# Altium PCB MCU.PcbDoc
Units mil, origin at the board's own origin, x right, y up, seen from the top; angles counter-clockwise.
Board outline 2559.06 x 2559.06 mil, 2 copper layers (Top Layer, Bottom Layer); 48 components, 36 nets, 232 pads, 20 vias.
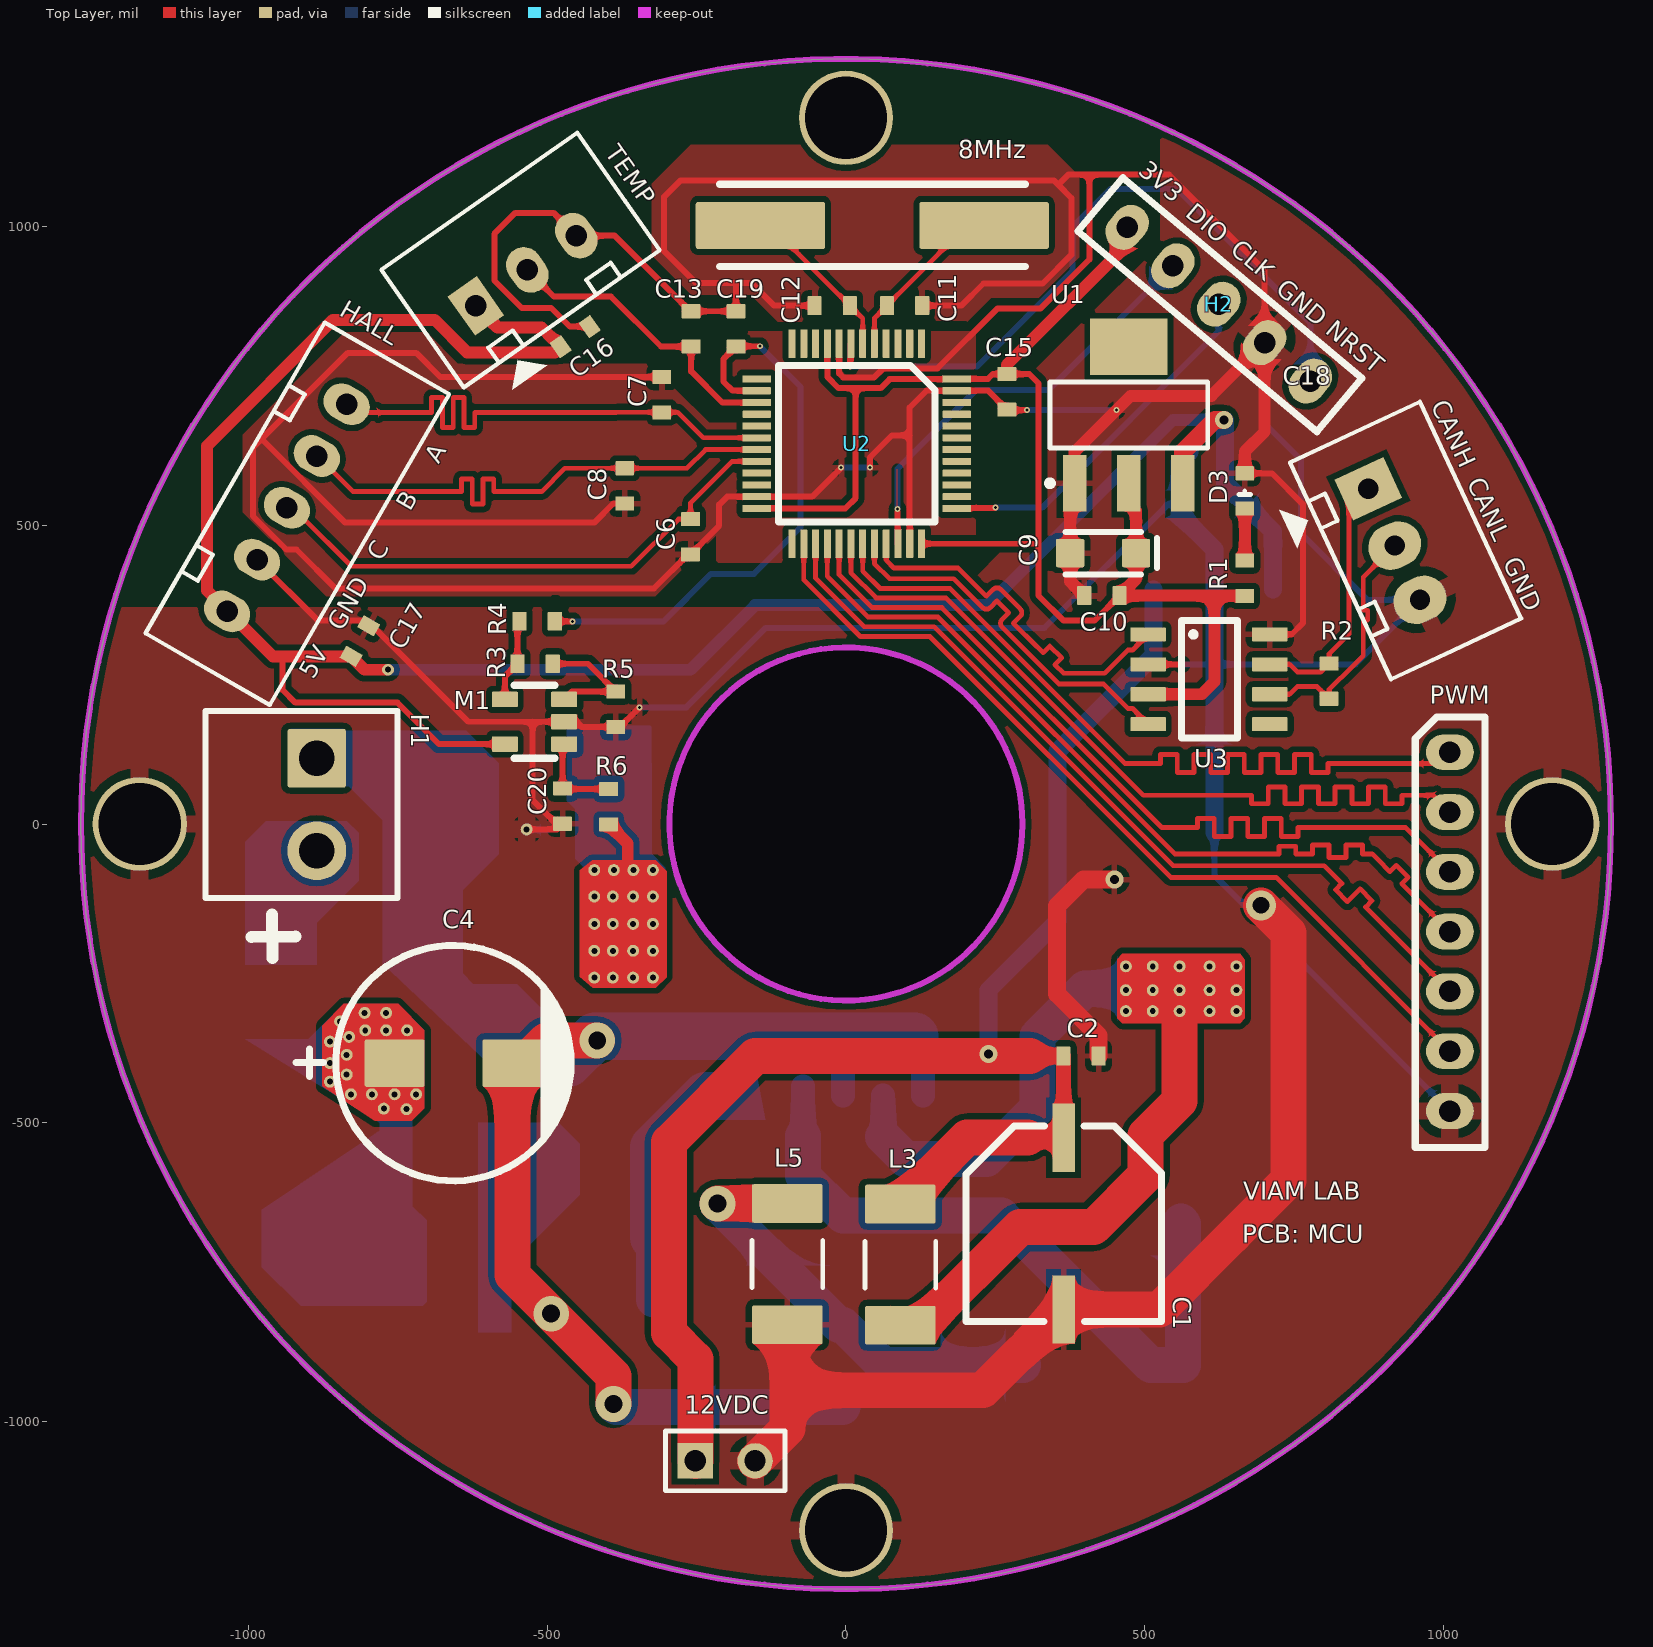
[diagram p0: Top Layer view]
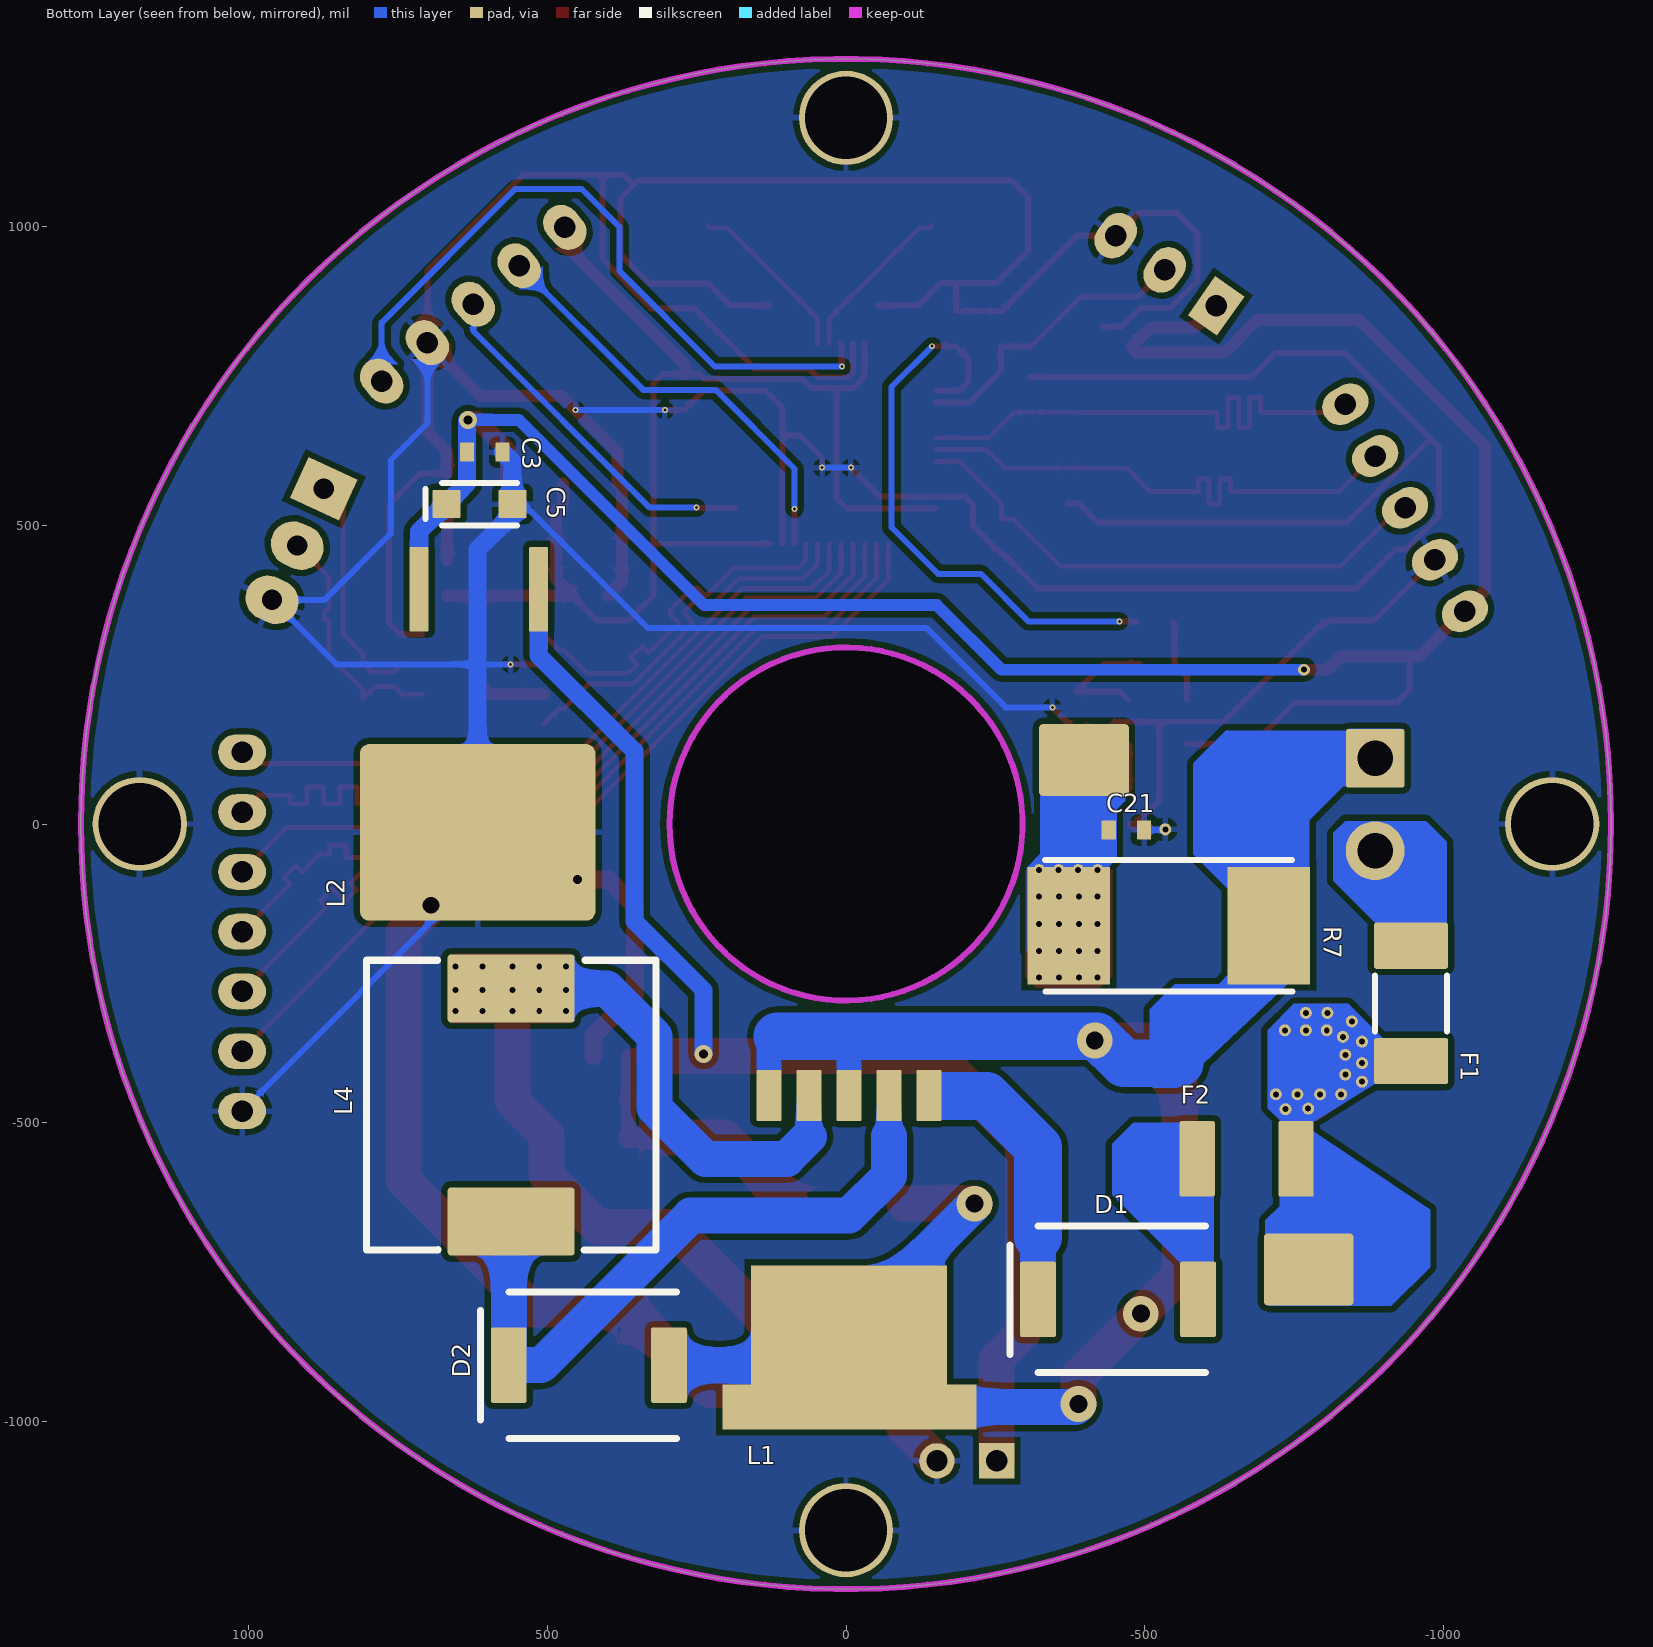
[diagram p1: Bottom Layer view, seen from below]
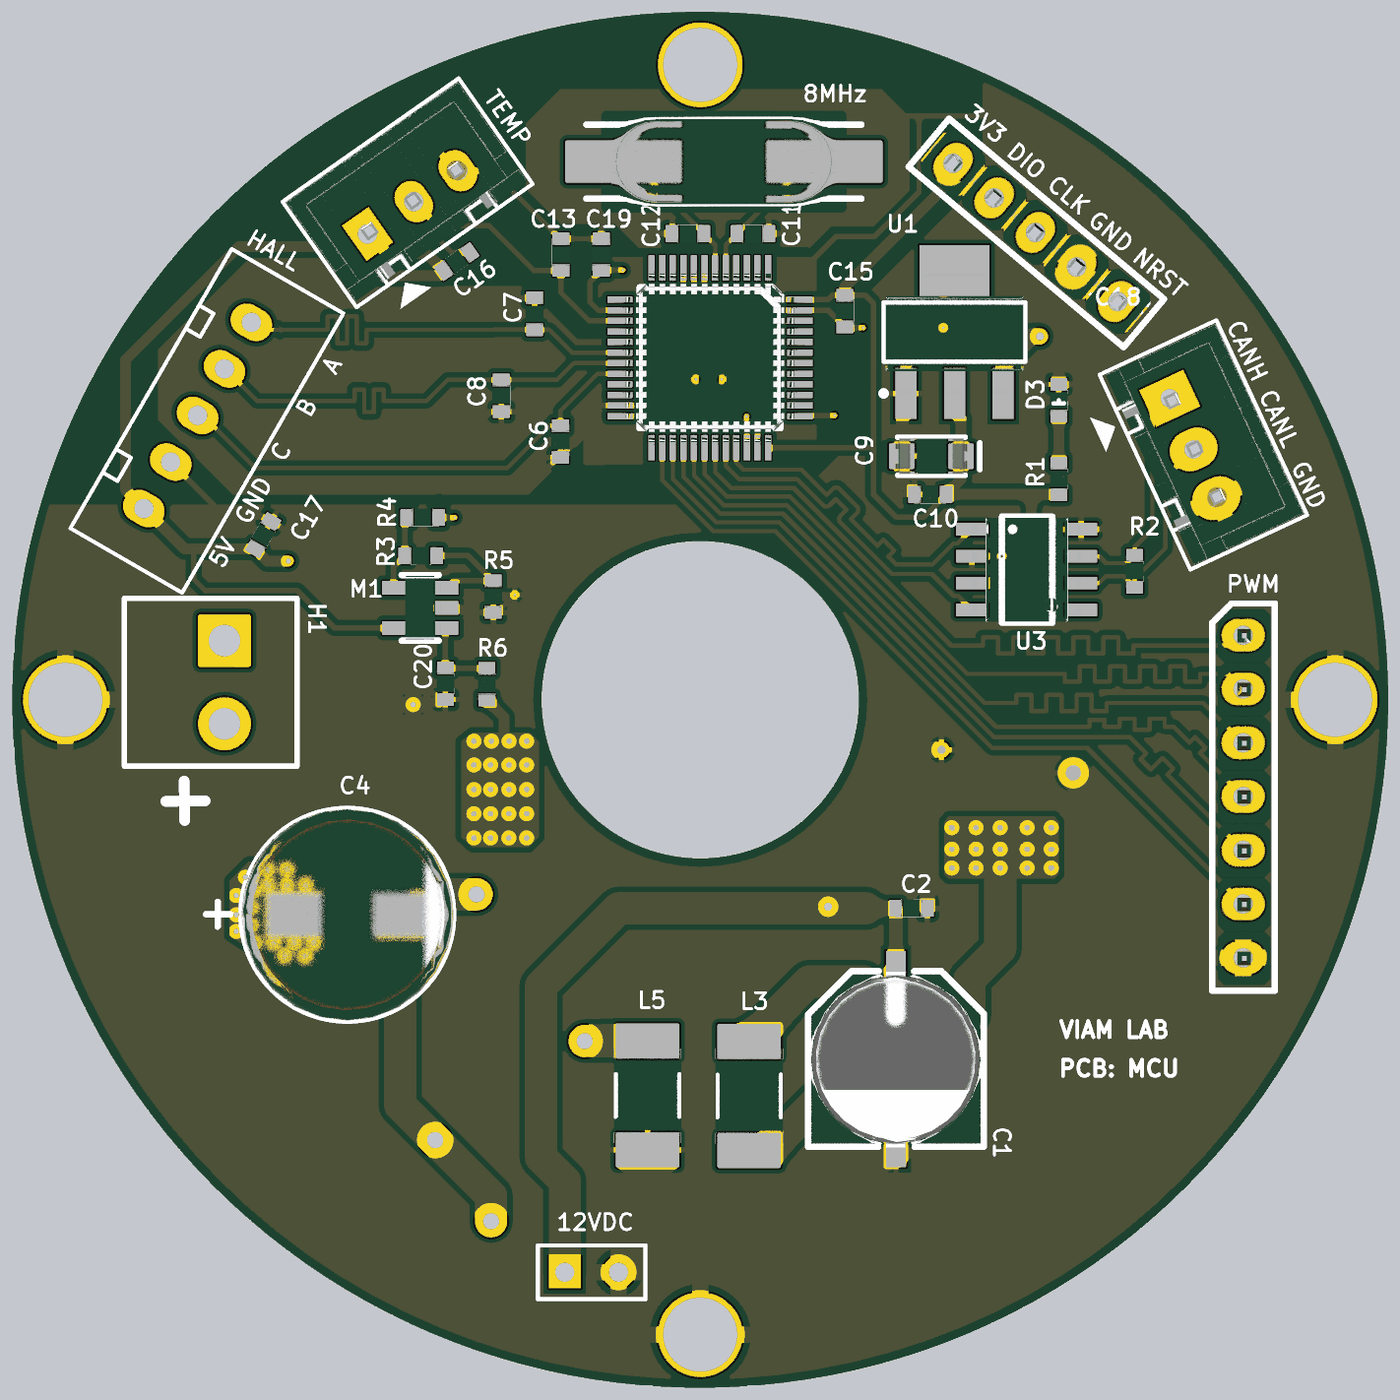
[diagram p2: 3D render of the assembled board from above, using the file's embedded part models]
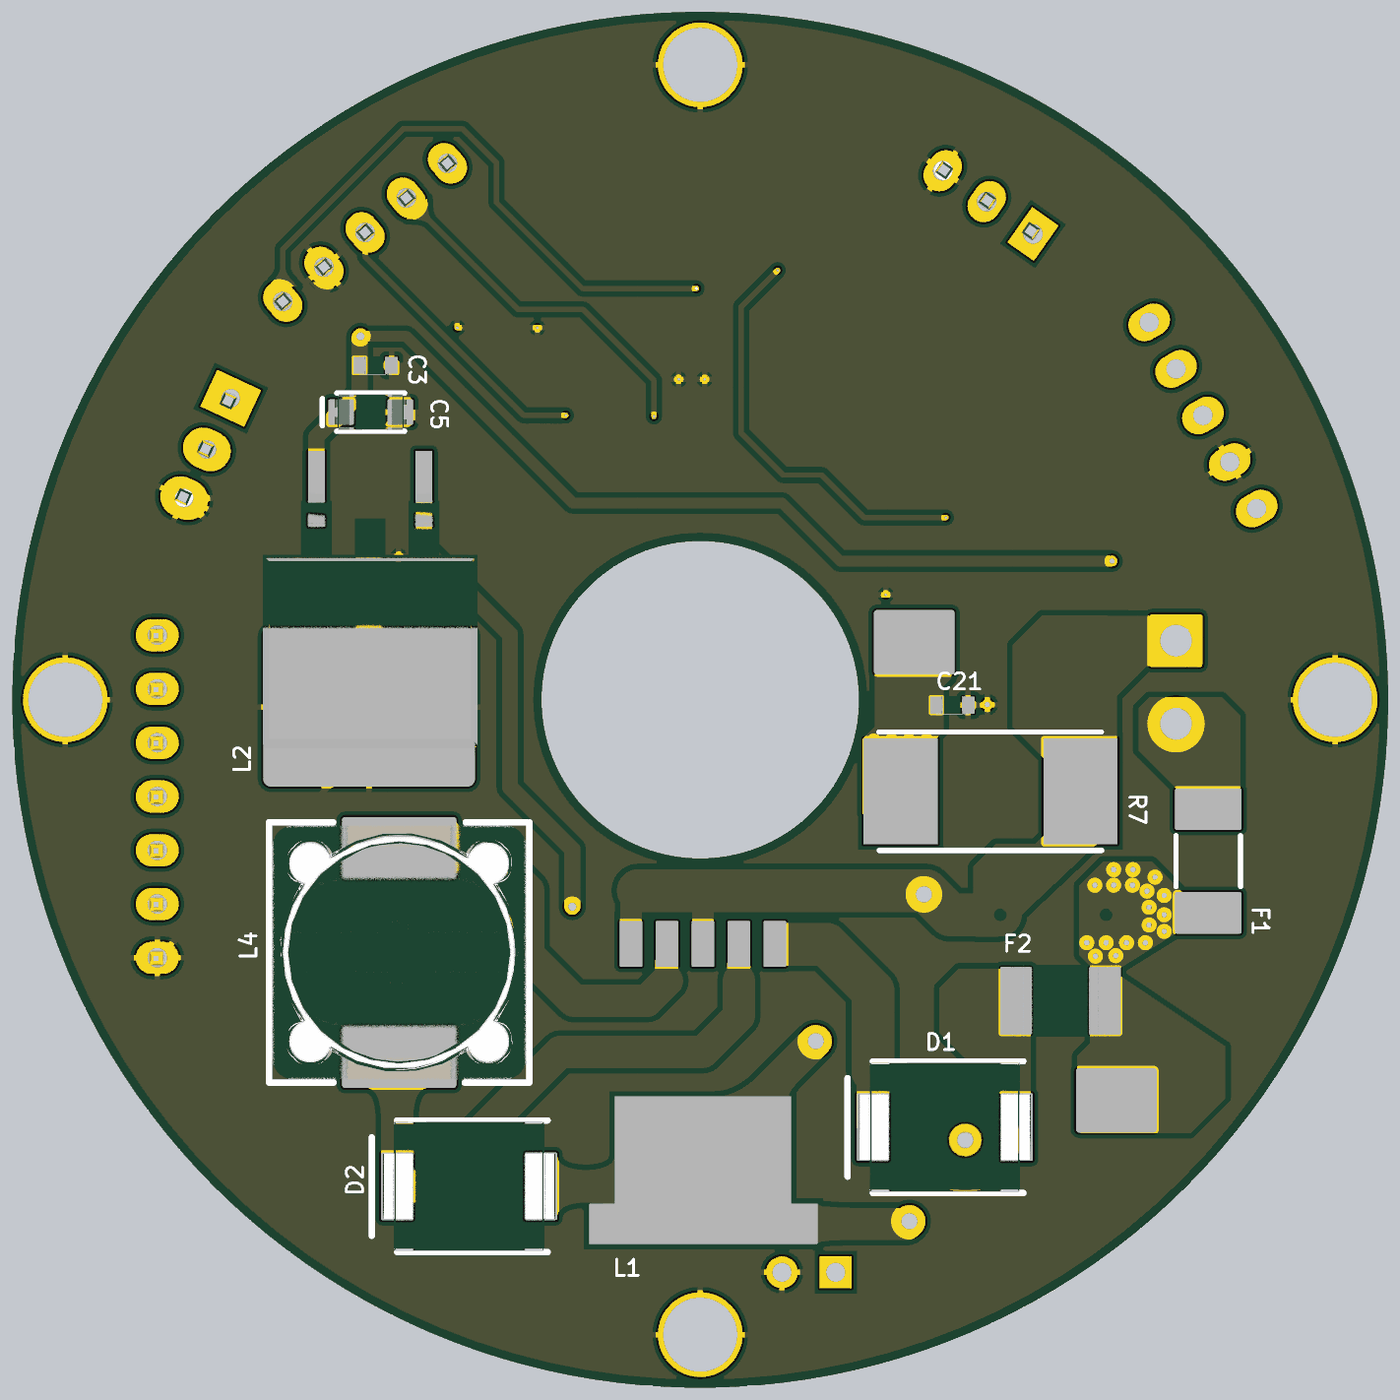
[diagram p3: 3D render of the assembled board from below, using the file's embedded part models]

## Layer stack, top to bottom
Top Solder: solder mask 0.4, Solder Resist, Dk 3.5
Top Layer: signal copper 1.4
Dielectric 1: dielectric 12.6, FR-4, Dk 4.8
Bottom Layer: signal copper 1.4
Bottom Solder: solder mask 0.4, Solder Resist, Dk 3.5

## Board outline
-1279.53,0 ccw(c0,0) 0,-1279.53 ccw(c0,0) 1279.53,0 ccw(c0,0) 0,1279.53 ccw(c0,0)
cut-out: -295.28,0 ccw(c0,0) 0,-295.28 ccw(c0,0) 295.28,0 ccw(c0,0) 0,295.28 ccw(c0,0)

## Design rules (kind name [scope] priority, off if disabled: settings)
Clearance [All] p1: gap=10 ignorepadtopadclearanceinfootprint=FALSE
DiffPairsRouting DiffPair_XTALDiffPairsRouting [InDifferentialPair ('DIFFXTAL')] p1: maxlimit=16 minlimit=16 mostfreqgap=16 toplayer_minwidth=8 toplayer_maxwidth=8 toplayer_prefwidth=8 bottomlayer_minwidth=8 bottomlayer_maxwidth=8 bottomlayer_prefwidth=8 maxuncoupledlength=500
DiffPairsRouting DiffPair_U2CANDiffPairsRouting [InDifferentialPair ('DIFFU_CAN')] p2: maxlimit=10 minlimit=10 mostfreqgap=10 toplayer_minwidth=8 toplayer_maxwidth=8 toplayer_prefwidth=8 bottomlayer_minwidth=8 bottomlayer_maxwidth=8 bottomlayer_prefwidth=8 maxuncoupledlength=500
DiffPairsRouting DiffPair_CANDiffPairsRouting [InDifferentialPair ('DIFFCAN')] p3: maxlimit=16 minlimit=16 mostfreqgap=16 toplayer_minwidth=8 toplayer_maxwidth=8 toplayer_prefwidth=8 bottomlayer_minwidth=8 bottomlayer_maxwidth=8 bottomlayer_prefwidth=8 maxuncoupledlength=500
DiffPairsRouting [InDifferentialPairClass('CANClass')] p4: maxlimit=16 minlimit=16 mostfreqgap=16 toplayer_minwidth=8 toplayer_maxwidth=8 toplayer_prefwidth=8 bottomlayer_minwidth=8 bottomlayer_maxwidth=8 bottomlayer_prefwidth=8 maxuncoupledlength=500
MatchedLengths HALLSensor [InNetClass('HALLSensor')] p1: tolerance=10 checknetsindiffpair=FALSE checkdiffpairvsdiffpair=TRUE checkxsignals=TRUE checkothers=TRUE
MatchedLengths DiffPair_XTALMatchedLengths [InDifferentialPair ('DIFFXTAL')] p2: tolerance=10 checknetsindiffpair=TRUE checkdiffpairvsdiffpair=FALSE checkxsignals=FALSE checkothers=FALSE
MatchedLengths DiffPair_U2CANMatchedLengths [InDifferentialPair ('DIFFU_CAN')] p3: tolerance=10 checknetsindiffpair=TRUE checkdiffpairvsdiffpair=FALSE checkxsignals=FALSE checkothers=FALSE
MatchedLengths DiffPair_CANMatchedLengths [InDifferentialPair ('DIFFCAN')] p4: tolerance=10 checknetsindiffpair=TRUE checkdiffpairvsdiffpair=FALSE checkxsignals=FALSE checkothers=FALSE
MatchedLengths PWM [InNetClass('PWM')] p5: tolerance=10 checknetsindiffpair=FALSE checkdiffpairvsdiffpair=TRUE checkxsignals=TRUE checkothers=TRUE
PlaneConnect [InPadClass('All Pads')] p1: planeconnectstyle=Relief reliefexpansion=30 reliefentries=4 reliefconductorwidth=30 reliefairgap=10
PolygonConnect PolygonConnect_3 [All vs IsNamedPolygon('Top Layer-GND')] p1: thpad.connectstyle=Relief thpad.reliefconductorwidth=30 thpad.reliefentries=4 thpad.polygonreliefangle="90 Angle" thpad.airgapwidth=15 smdpad.connectstyle=Relief smdpad.reliefconductorwidth=10 smdpad.reliefentries=4 smdpad.polygonreliefangle="90 Angle" smdpad.airgapwidth=10 via.connectstyle=Relief via.reliefconductorwidth=10 via.reliefentries=4 via.polygonreliefangle="90 Angle" via.airgapwidth=10
PolygonConnect PolygonConnect_2 [All vs IsNamedPolygon('Top Layer-GND 3') Or  IsNamedPolygon('Top Layer-GND 2')] p2: thpad.connectstyle=Relief thpad.reliefconductorwidth=30 thpad.reliefentries=4 thpad.polygonreliefangle="90 Angle" thpad.airgapwidth=10 smdpad.connectstyle=Relief smdpad.reliefconductorwidth=10 smdpad.reliefentries=4 smdpad.polygonreliefangle="90 Angle" smdpad.airgapwidth=10 via.connectstyle=Relief via.reliefconductorwidth=10 via.reliefentries=4 via.polygonreliefangle="90 Angle" via.airgapwidth=10
PolygonConnect PolygonConnect_1 [All vs IsNamedPolygon('Top Layer-GND') Or  IsNamedPolygon('Top Layer-GND 2')] p3: thpad.connectstyle=Direct thpad.reliefconductorwidth=10 thpad.reliefentries=4 thpad.polygonreliefangle="90 Angle" thpad.airgapwidth=10 smdpad.connectstyle=Relief smdpad.reliefconductorwidth=10 smdpad.reliefentries=4 smdpad.polygonreliefangle="90 Angle" smdpad.airgapwidth=10 via.connectstyle=Relief via.reliefconductorwidth=10 via.reliefentries=4 via.polygonreliefangle="90 Angle" via.airgapwidth=10
PolygonConnect [All] p4: connectstyle=Relief reliefconductorwidth=10 reliefentries=4 polygonreliefangle="90 Angle" airgapwidth=10
RoutingVias [All] p1: holewidth=28 width=50 viastyle="Through Hole" minholewidth=28 minwidth=50 maxholewidth=28 maxwidth=50
SolderMaskExpansion [All] p1: expansion=4
Width [All] p1: maxlimit=100 minlimit=8 preferedwidth=8
28 further rules are at their usual default settings.

## Classes and differential pairs
differential pair class DIFFXTAL: DIFFXTAL
differential pair class CANClass: DIFFCAN DIFFU_CAN
differential pair DIFFXTAL: +DIFFXTAL_P -DIFFXTAL_N
differential pair DIFFCAN: +DIFFCAN_P -DIFFCAN_N

## Components (designator, comment, footprint, x,y, rotation, side; value= is the part's Value field where it differs from the comment)
8MHz "8MHz" Crystal 43.99,1001 r180 top (schematic designator X1)
12VDC "12V" HDR1X2 -252,-1065 r0 top (schematic designator P1)
C1 "330uF/16V" 330uF/16V 364,-524.6 r270 top
C2 "104" "Non-Capacitor 104 SMD" 393,-388 r180 top
C3 "104" "Non-Capacitor 104 SMD" 604,622 r0 bottom
C4 "100uF/100V" 100uF/100V -755,-400 r0 top
C5 "10uF/16V" 10uF/16V 613,535 r0 bottom
C6 "104" "Non-Capacitor 104 SMD" -260,480.47 r90 top
C7 "104" "Non-Capacitor 104 SMD" -308,718 r270 top
C8 "104" "Non-Capacitor 104 SMD" -370,565.47 r90 top
C9 "10uF/16V" 10uF/16V 430,453 r0 top
C10 "104" "Non-Capacitor 104 SMD" 428,382 r0 top
C11 "33pF" "Non-Capacitor 104 SMD" 98,867 r180 top
C12 "33pF" "Non-Capacitor 104 SMD" -23,867 r0 top
C13 "104" "Non-Capacitor 104 SMD" -259,828 r90 top
C15 "104" "Non-Capacitor 104 SMD" 269,723 r90 top
C16 "104" "Non-Capacitor 104 SMD" -453,815 r215 top
C17 "104" "Non-Capacitor 104 SMD" -813,306 r240 top
C18 "CANBUS" Header3#1 875.48,556.26 r295 top
C19 "103" "Non-Capacitor 104 SMD" -184,828 r270 top
C20 "47nF" "Non-Capacitor 104 SMD" -474,30 r90 top
C21 "47nF" "Non-Capacitor 104 SMD" -469,-10 r0 bottom
D1 "SS310" SS310 -455,-795 r180 bottom
D2 "SS34" SS34 430,-905 r180 bottom
D3 "LED SMD0603" "Led SMD0603" 667,557 r90 top
F1 "20A" "Fuse 20A" -945,-300 r270 bottom
F2 "Resetable" "PTC Resettable Fuses" -670,-560 r0 bottom
H1 "Power 48V" "Header 2" -885,110 r270 top
H2 "Debugger" "Header 5" 470.19,997.84 r320 top
HALL "HALL" Header_5_B -835,702 r240 top (schematic designator H3)
L1 "LM2576HVS" "LM2576 SMD" -5,-665 r0 bottom
L2 "LM7805" "LM7805 SMD" 614,189.25 r0 bottom
L3 "120Ohm" "Ferrite Beads" 91,-737 r90 top
L4 "L127H-101M" L127H-101M 560,-470 r90 bottom
L5 "120Ohm" "Ferrite Beads" -98,-736 r270 top
M1 "MCP6001UT" MCP6001UT -521,171 r0 top
PWM "Header 7x1" "Header 7 Male" 1010,120 r270 top (schematic designator H4)
R1 "330" "Resistor SMD 0603" 667,411 r90 top
R2 "120" "Resistor SMD 0603" 808,239 r90 top
R3 "10K" "Resistor SMD 0603" -520,268 r180 top
R4 "330" "Resistor SMD 0603" -516.53,339 r0 top
R5 "1K" "Resistor SMD 0603" -385,192 r90 top
R6 "1K" "Resistor SMD 0603" -397,29 r90 top
R7 "0.005" Shunt -540,-170 r0 bottom
TEMP "Temperature" Header3#2 -614.83,869.28 r35 top (schematic designator C14)
U1 "LM1117-3.3V" SOT223 473,684 r0 top
U2 "STM32F103C8T6" STM32F103C8T6 18,636 r180 top
U3 "SN65HVD230D" SN65HVD230D 607,242 r270 top

## Footprints (in the part's own frame and the unit in brackets; to place one, negate y for a bottom-side part, rotate by r counter-clockwise, add the part's x,y. Pads: shape width x height; smd on the part's side, far side on the other; paste and mask are expansions set on the pad)
10uF/16V [mm]
  rrect10% 1.2x1.2 smd mask+0.1: 1(1.4,0) 2(-1.4,0)
  silkscreen extent -1.6,-0.9 2.29,0.9, body extent -1.7,-0.84 1.7,0.84
100uF/100V [mil] "CAP-D10.0XF5.0"
  rrect10% 100x80 smd mask+3.94: 1(0,0) 2(196.85,0)
  silkscreen extent -165,-197 295,197, body extent -98,-197 296,197, height 650
330uF/16V [mm] "Aluminium Capacitor"
  rect 2.9x0.95 smd: 1(0,0) 2(7.3,0)
  silkscreen extent -0.5,-4.15 7.8,4.15, body extent -1.32,-4.16 8.68,4.14, height 10.2
Crystal [mm] "8MHz"
  rrect10% 5.5x2 smd mask+0.1: 1(-4.75,0) 2(4.75,0)
  silkscreen extent -6.5,-1.75 6.5,1.75, body extent -6.4,-2.42 6.4,2.42, height 4.3
"Ferrite Beads" [mm] "Nickel barrier plating virtually eliminates silver migration"
  rrect10% 1.65x3 smd mask+0.1: 1(-2.575,0) 2(2.575,0)
  silkscreen extent -1,-1.5 1,1.5, body extent -2.25,-1.6 2.25,1.6
"Fuse 20A" [mm]
  rrect10% 1.96x3.15 smd mask+0.1: 1(-2.45,0) 2(2.45,0)
  silkscreen extent -1.19,-1.52 1.19,1.52
HDR1X2 [mm] "Connector; Header; 2 Position"
  rect 1.5x1.5 hole 0.9: 1(0,0)
  round 1.5 hole 0.9: 2(2.54,0)
  silkscreen extent -1.27,-1.27 3.81,1.27, body extent -1.27,-1.27 3.81,1.27, height 7
Header3#1 [mil] "CON 3"
  rect 75x90 hole 34: 1(-5,0)
  oval 75x90 hole 34: 2(100,0) 3(200,0)
  silkscreen extent -100,-150 300,140, body extent -95,-90 295,136, height 276
Header3#2 [mil] "CON 3"
  rect 60x80 hole 36: 1(-5,0)
  oval 60x80 hole 36: 2(100,0) 3(200,0)
  silkscreen extent -100,-150 300,140, body extent -95,-90 295,136, height 276
"Header 2" [mm] "Header Male 2"
  rrect10% 2.5x2.5 hole 1.5 mask+0.1: 1(0,0)
  round 2.5 hole 1.5 mask+0.1: 2(3.93,0)
  silkscreen extent -2,-4.72 5.93,3.42
"Header 5" [mil] "Header Male 5"
  oval 60x80 hole 36 mask+3.94: 1(0,0) 2(100,0) 3(200,0) 4(300,0) 5(400,0)
  silkscreen extent -59,-58 463,59, body extent -50,-49 450,49, height 337
"Header 7 Male" [mil]
  oval 60x80 hole 36 mask+3.94: 1(0,0) 2(100,0) 3(200,0) 4(300,0) 5(400,0) 6(500,0) 7(600,0)
  silkscreen extent -59,-58 661,59, body extent -49,-47 651,51, height 336
Header_5_B [mil]
  oval 60x80 hole 36: 1(0,0) 2(100,0) 3(200,0) 4(300,0) 5(400,0)
  silkscreen extent -100,-100 500,140
L127H-101M [mm] "Size: SMD L x W x H = 12 x 12 x 8 mm"
  rrect10% 2.9x5.4 smd mask+0.1: 1(-4.95,0) 2(4.95,0)
  silkscreen extent -6.15,-6.15 6.15,6.15, body extent -6,-6 6,6, height 8
"Led SMD0603" [mm] "3.0 - 3.5V"
  rrect10% 0.6x0.8 smd mask+0.07: 1(-0.75,0) 2(0.75,0)
  silkscreen extent -0.15,-0.25 0,0.25, body extent -0.77,-0.42 0.78,0.43, height 0.45
"LM2576 SMD" [mm] "DDPAK 5 Leads"
  rrect10% 1.07x2.16 smd mask+0.1: 1(-3.4,-5.359) 2(-1.7,-5.359) 3(0,-5.359) 4(1.7,-5.359) 5(3.4,-5.359)
  rect 10.8x1.91 smd mask+0: 3(-0.025,7.874)
  rect 8.33x5.08 smd mask+0: 3(0,4.394)
  body extent -5.11,-6.05 5.05,8.18, height 4.87
"LM7805 SMD" [mm] "D2PAK"
  rrect10% 0.8x3.59 smd mask+0.1: 1(-2.54,-5.163) 3(2.54,-5.163)
  rrect10% 10x7.5 smd mask+0.1: 2(0.051,5.163)
  body extent -5.08,-6.96 5.08,8.31, height 4.98
MCP6001UT [mm] "1 MHz, Low-Power Op Amp, Package: SOT23"
  rrect10% 1.1x0.65 smd mask+0.07: 1(1.258,-0.95) 2(1.258,0) 3(1.258,0.95) 4(-1.258,0.95) 5(-1.258,-0.95)
  silkscreen extent -0.87,-1.55 0.87,1.55, body extent -1.25,-1.5 1.25,1.5, height 1.05
"Non-Capacitor 104 SMD" [mm] "SMD0603"
  rrect10% 0.6x0.8 smd mask+0.07: 1(-0.75,0) 2(0.75,0)
  body extent -0.77,-0.42 0.78,0.43, height 0.45
"PTC Resettable Fuses" [mm] "2.5A/16V SMD-1812"
  rrect10% 1.5x3.2 smd mask+0.07: 1(-2.1,0) 2(2.1,0)
  body extent -2.36,-1.71 2.37,1.71, height 1.34
"Resistor SMD 0603" [mm] "SMD 0603 inches"
  rrect10% 0.6x0.8 smd mask+0.07: 1(-0.75,0) 2(0.75,0)
  body extent -0.77,-0.42 0.78,0.43, height 0.45
Shunt [mm]
  rect 3.5x5 smd: 1(-4.25,0) 2(4.25,0)
  silkscreen extent -5.25,-2.79 5.27,2.8
SN65HVD230D [mm] "IC CAN TRANSCEIVER 3.3V 8-SOIC, TI"
  rrect10% 0.6x1.5 smd mask+0.1: 1(-1.905,-2.582) 2(-0.635,-2.582) 3(0.635,-2.582) 4(1.905,-2.582) 5(1.905,2.583) 6(0.635,2.583) 7(-0.635,2.583) 8(-1.905,2.583)
  silkscreen extent -2.5,-1.17 2.5,1.22, body extent -2.45,-3 2.45,3, height 1.75
SOT223 [mm]
  rect 1x2.4 smd: 1(-2.3,-2.9) 2(0,-2.9) 3(2.3,-2.9)
  rect 3.3x2.4 smd: 4(0,2.9)
  silkscreen extent -3.47,-3.02 3.35,1.4, body extent -3.25,-3.56 3.25,3.4, height 1.68
SS34 [mm] "SMC (DO-214AB)"
  rrect10% 1.52x3.2 smd mask+0.1: 1(-3.4,0) 2(3.4,0)
  silkscreen extent -4.6,-3.11 3.71,3.11, body extent -4.06,-3.05 4.07,3.05, height 2.4
SS310 [mm] "Diode Schottky SMC/DO-214AB"
  rrect10% 1.52x3.2 smd mask+0.1: 1(-3.4,0) 2(3.4,0)
  silkscreen extent -4.6,-3.11 3.71,3.11, body extent -4.06,-3.05 4.07,3.05, height 2.4
STM32F103C8T6 [mm] "LQFP48 7 x 7 mm"
  rrect10% 0.3x1.2 smd mask+0.07: 1(-2.75,-4.25) 2(-2.25,-4.25) 3(-1.75,-4.25) 4(-1.25,-4.25) 5(-0.75,-4.25) 6(-0.25,-4.25) 7(0.25,-4.25) 8(0.75,-4.25) 9(1.25,-4.25) 10(1.75,-4.25) 11(2.25,-4.25) 12(2.75,-4.25) 25(2.75,4.25) 26(2.25,4.25) 27(1.75,4.25) 28(1.25,4.25) 29(0.75,4.25) 30(0.25,4.25) 31(-0.25,4.25) 32(-0.75,4.25) 33(-1.25,4.25) 34(-1.75,4.25) 35(-2.25,4.25) 36(-2.75,4.25)
  rrect10% 1.2x0.3 smd mask+0.07: 13(4.25,-2.75) 14(4.25,-2.25) 15(4.25,-1.75) 16(4.25,-1.25) 17(4.25,-0.75) 18(4.25,-0.25) 19(4.25,0.25) 20(4.25,0.75) 21(4.25,1.25) 22(4.25,1.75) 23(4.25,2.25) 24(4.25,2.75) 37(-4.25,2.75) 38(-4.25,2.25) 39(-4.25,1.75) 40(-4.25,1.25) 41(-4.25,0.75) 42(-4.25,0.25) 43(-4.25,-0.25) 44(-4.25,-0.75) 45(-4.25,-1.25) 46(-4.25,-1.75) 47(-4.25,-2.25) 48(-4.25,-2.75)
  silkscreen extent -3.33,-3.33 3.33,3.33, body extent -4.5,-4.5 4.5,4.5, height 1.6

## Part data
8MHz: library part Crystal
12VDC: library part "Header 2", "Header, 2-Pin", LatestRevisionDate=17-Jul-2002, LatestRevisionNote="Re-released for DXP Platform.", Publisher="Altium Limited"
C4: library part "Polary Capacitor", "DIP Footprint"
C11 C12 C19 C20 C21: library part 104
C18 TEMP: library part Header3, "Header IDC, 3 x 1 Pin Vertical 2.54mm Pitch (Non-Boxed, Male)", Manufacturer="Würth Elektronik eiSos GmbH", partNo=613002143121, ComponentLink1 Description=Manufacturer, ComponentLink1URL=http://www.we-online.com, ComponentLink2 Description=Datasheet, ComponentLink2URL=http://katalog.we-online.de/em/datasheet/6130xx143121.pdf, Created by="Karrer Zheng", Created Date="29 March 2013", NoPins=02
F1 F2: library part Fuse
H1: library part "Header 2x1"
H2 HALL: library part "Header 5x1"
L3 L5: library part "Ferrite Beads"
R1 R2 R3 R4 R5 R6: library part Resistors
R7: library part "Shunt Resistor"
U1: library part LM1117, "800mA Low-Dropout Linear Regulator", Creator="Nguyen Ba Bien", Website=http://group3i.net
U2: "ARM® 32-bit Cortex®-M3"

## Free pads (board coordinates)
  round 20 hole 10: 2(-863,-431) 2(-863,-400) 2(-863,-364) 2(-846,-330) 2(-835,-419) 2(-835,-386) 2(-831,-356) 2(-828,-452) 2(-805,-316) 2(-804,-345) 2(-793,-452) 2(-773,-476) 2(-769,-345) 2(-769,-316) 2(-755,-452) 2(-735,-477) 2(-734,-345) 2(-719,-452) 2(-534,-9) 2(-421,-257) 2(-421,-212) 2(-421,-167) 2(-421,-121.25) 2(-421,-77) 2(-390,-257) 2(-390,-212) 2(-390,-167) 2(-390,-121.25) 2(-388.33,-77) 2(-356,-257) 2(-356,-212) 2(-356,-167) 2(-356,-121.25) 2(-355.67,-77) 2(-323,-77) 2(-323,-257) 2(-323,-212) 2(-323,-167) 2(-323,-121.25) 2(468,-313) 2(468,-278) 2(468,-238) 2(513,-313) 2(513,-278) 2(513,-238) 2(558,-313) 2(558,-278) 2(558,-238) 2(608,-313) 2(608,-278) 2(608,-238) 2(653,-313) 2(653,-278) 2(653,-238)
  rrect10% 150x120 smd far side: 3(-774,-745) 3(-398,107)
  round 157.48 hole 137.79: 4(-1181,0) 4(0,-1181) 4(0,1181.1) 4(1181.1,0)

## Via types
v1: diameter 10, hole 5, Top Layer to Bottom Layer, 11 vias
v2: diameter 60, hole 30, Top Layer to Bottom Layer, 4 vias
v3: diameter 30, hole 15, Top Layer to Bottom Layer, 3 vias
v4: diameter 20, hole 10, Top Layer to Bottom Layer, 1 vias
v5: diameter 50, hole 28, Top Layer to Bottom Layer, 1 vias

## Nets (pads, with @x,y where several pads share a name; then routed paths per layer and width w, separated by ;. In a path a pad name is that pad's centre, name@x,y a point inside that pad or via, vN(x,y) a via of type N, cw(c..) or ccw(c..) an arc to the next point about the centre after c; other vN are vias at no path point)
3V3: C9.1 C10.2 C15.2 H2.1 R1.1 U1.2 U2.9 U2.24 U2.36 U2.48 U3.3 | length 2517.2
  Top Layer w10: U2.24 -1.27,527.73 16,545 16,729 ; U2.9 -31.21,747.76 -12.46,729 16,729 ; U2.36 319.68,468.68 322,471 ; C10.2 415.53,340 364,340 322,382 322,471 ; 16,729 58,729 73,744 185.06,744 U2.48 237.27,744.27 245.53,752.53 C15.2 306.47,752.53 322,737 322,471
  Top Layer w20: C15.2 269,768 470.19,969.19 H2.1 ; U1.2 473,536 485.12,523.88 C9.1 485.12,409.59 C10.2 616,382 ; U3.3 595,217 616,238 616,382 ; R1.1 666.47,382 616,382
5V: C3.2 C5.1 C16.2 C17.2 HALL.5 L2.3 M1.5 TEMP.1 U1.3 | length 3972.3
  Top Layer w10: -942,280.43 -942,224 -921,203 -750,203 -680.6,133.6 M1.5
  Top Layer w20: v4(-766,258) -805.34,258 C17.2 -942,280.43 -958.63,280.43 -1069,390.8 -1069,632 -858,843 -688,843 -633.5,788.5 -486.75,788.5 C16.2 -509.12,830 -582.51,830 TEMP.1
  Top Layer w30: U1.3 563.55,622.55 617,676 v3(632,676)
  Bottom Layer w20: v4(-766,258) -260,258 -152,366 237,366 547,676 v3(632,676)
  Bottom Layer w30: v3(632,676) 633.53,674.47 C3.2 633.53,569.59 C5.1 714,489.12 L2.3
12V: 12VDC.1 C1.1 C2.2 L2.1 L3.2 | length 2618.5
  Top Layer w25: 308,-388 C2.2 364,-388.53 C1.1
  Top Layer w35: 304,-524 363.4,-524 C1.1
  Top Layer w60: 12VDC.1 -252,-895 -296,-851 -296,-532 -152,-388 308,-388 ; L3.2 202.62,-524 304,-524
  Bottom Layer w30: v3(238,-385) 238,-278 354,-162 354,122 514,282 L2.1
+VPS: C4.1 F1.2 F2.1 pad.2@-719,-452 pad.2@-734,-345 pad.2@-735,-477 pad.2@-755,-452 pad.2@-769,-316 pad.2@-769,-345 pad.2@-773,-476 pad.2@-793,-452 pad.2@-804,-345 pad.2@-805,-316 pad.2@-828,-452 pad.2@-831,-356 pad.2@-835,-386 pad.2@-835,-419 pad.2@-846,-330 pad.2@-863,-364 pad.2@-863,-400 pad.2@-863,-431 pad.3@-774,-745
-VPS: C21.2 pad.2@-323,-77 pad.2@-323,-121.25 pad.2@-323,-167 pad.2@-323,-212 pad.2@-323,-257 pad.2@-355.67,-77 pad.2@-356,-121.25 pad.2@-356,-167 pad.2@-356,-212 pad.2@-356,-257 pad.2@-388.33,-77 pad.2@-390,-121.25 pad.2@-390,-167 pad.2@-390,-212 pad.2@-390,-257 pad.2@-421,-77 pad.2@-421,-121.25 pad.2@-421,-167 pad.2@-421,-212 pad.2@-421,-257 pad.3@-398,107 R6.1 R7.2 | length 87.7
  Top Layer w20: R6.1 -365,-32.53 pad.2@-365,-75
DIFFCAN_N: C18.2 R2.1 U3.6 | length 430.1
  Top Layer w8: U3.6 742.2,217 755.2,230 787.47,230 R2.1 808,225.28 827.43,244.72 828.03,244.72 865,281.69 865,296 865,304 865,317.34 865,325.34 865,341.34 872.45,341.34 872.45,357.34 865,357.34 865,375 865,412.89 C18.2
DIFFCAN_P: C18.1 R2.2 U3.7 | length 430.1
  Top Layer w8: U3.7 742.2,267 755.2,254 793.47,254 R2.2 808,284.34 841,317.34 841,412.89 841,528.43 C18.1
DIFFXTAL_N: 8MHz.2 C12.2 U2.6 | length 277.6
  Top Layer w8: 8MHz.2 -139.02,997 -123.47,997 C12.2 27.84,845.69 U2.6
DIFFXTAL_P: 8MHz.1 C11.2 U2.5 | length 290.4
  Top Layer w8: U2.5 47.53,846.06 C11.2 198.47,997 227,997 8MHz.1
GND: 12VDC.2 C1.2 C2.1 C3.1 C5.2 C6.1 C7.1 C8.1 C9.2 C10.1 C11.1 C12.1 C13.2 C15.1 C16.1 C17.1 C18.3 C19.1 C20.1 C21.1 D3.2 H2.4 HALL.4 L2.2 L5.2 M1.2 pad.2@-534,-9 pad.4 PWM.7 R5.1 TEMP.3 U1.1 U2.8 U2.23 U2.35 U2.47 U3.2 U3.8 | length 14788.3
  Top Layer w10: HALL.4 -882.81,340 -806.66,340 C17.1 ; C17.1@-798.04,337.57 -631.47,171 -524,171 ; pad.2@-534,-9 -483.47,-9 C20.1 -484.47,0.47 -524,40 -524,171 ; C16.1 -461.94,831.94 -493,863 -542,863 -588,909 -588,987 -553,1022 -489,1022 TEMP.3 -387,984 -260.53,857.53 C13.2 C19.1 -184,904 -185,905 ; C8.1 -389.06,535.94 -421,504 -837.61,504 -975.11,641.5 -979.5,641.5 ; v1(-345,195.12) -377.65,162.47 R5.1 -442.47,162.47 -451,171 M1.2 -524,171 ; C7.1 -678.53,747.53 -719,788 -833,788 -979.5,641.5 ; C12.1 -120,867 -158,905 -185,905 ; U2.8 -11.53,753.53 -5,747 47,747 62,762 153,762 253,862 325,862 407,944 407,1086 ; v1(-8,596) -56.58,547.42 U2.23 -198.58,547.42 -212,534 -212,498.94 C6.1 -264.06,450.94 -321,394 -854,394 -919,459 -936,459 -992,515 -992,629 -979.5,641.5 ; v1(40,596) 40,613 77,650 106.58,650 ; U2.35 106.58,650 ; C11.1 193,867 230,904 329,904 377,952 377,1047 355,1069 ; v1(303,692) 270.47,692 C15.1 237.89,724.58 U2.47 134.58,724.58 106.58,696.58 106.58,650 ; U3.2 v1(561,267) ; D3.2 712.47,586.53 764,535 764,336 745,317 U3.8 ; H2.4 700,926 540,1086 407,1086 ; -185,905 -251,905 -304,958 -304,1049 -277,1076 348,1076 355,1069 ; 355,1069 372,1086 407,1086
  Top Layer w20: C10.1 374.88,405.59 C9.2 374.88,562.26 U1.1 382.45,622.45 v1(452,692) 476,716 611,716 H2.4 ; D3.2 667,623 700,656 H2.4@700,770
  Top Layer w30: C2.1 422.53,-353.53 353,-284 353,-137 397,-93 v3(449,-93)
  Top Layer w60: 12VDC.2 -98,-1011 -98,-947 ; L5.2@-84.62,-837.38 L5.2 -98,-947 ; 648,-688.58 648,-688 ; v5(694,-136) 740,-182 740,-596 648,-688 ; -98,-947 229,-947 C1.2 524,-812 648,-688
  Bottom Layer w10: pad.2@-534,-9 -533,-10 C21.1 ; v1(-345,195.12) -266.88,195.12 -134,328 332,328 539,535 C5.2 ; v1(-8,596) v1(40,596) ; v1(303,692) v1(452,692) ; v1(561,267) 614,267 ; L2.2 616,-86 PWM.7 ; 616,265 614,267 ; H2.4 700,670 761,609 761,486 872,375 C18.3 852,267 616,267 614,267
  Bottom Layer w30: C3.1 557.88,605.41 C5.2 557.88,517.12 616,459 616,267 ; L2.2 616,265
NetC6_2: C6.2 HALL.3 U2.20 | length 894
  Top Layer w8: HALL.3@-920,515 -911,515 -827,431 -359,431 -280,510 C6.2 -260,537 -190.53,606.47 U2.20
NetC7_2: C7.2 HALL.1 U2.18 | length 888.4
  Top Layer w8: HALL.1@-820,688.21 -765,688.21 -738,688.21 -702,688.21 -693,688.21 -693,713.21 -675,713.21 -675,688.21 -675,663.21 -657,663.21 -657,688.21 -657,713.21 -639,713.21 -639,688.21 -639,663.21 -621,663.21 -621,688.21 -575,688.21 -538,688.21 -529,688.21 -512,688.21 -384.21,688.21 -383.94,688.47 C7.2 -281.47,688.47 -238.84,645.84 U2.18
NetC8_2: C8.2 HALL.2 U2.19 | length 894
  Top Layer w8: HALL.2@-870,601.6 -824.4,556 -700,556 -691,556 -673,556 -670,556 -661,556 -643,556 -643,576.89 -625,576.89 -625,556 -625,535.11 -607,535.11 -607,556 -607,576.89 -589,576.89 -589,556 -553,556 -509,556 -470,595 C8.2 -266,595 -234.84,626.16 U2.19
NetC13_1: C13.1 TEMP.2 U2.15 | length 499.7
  Top Layer w10: TEMP.2 -488.27,882 -393,882 -309.47,798.47 C13.1 -259,757 -206.9,704.9 U2.15
NetC19_2: C19.2 R4.2 U2.14 | length 976.7
  Top Layer w10: R4.2 v1(-457,339) ; U2.14 -189.58,724.58 -205,740 -205,777.47 C19.2 -183.47,799 v1(-144,799)
  Bottom Layer w10: v1(-457,339) -305,339 -226,418 -154,418 -76,496 -76,731 v1(-144,799)
NetC20_2: C20.2 M1.1 R6.2 | length 152.5
  Top Layer w10: M1.1 -474,131.09 C20.2 -473,58.53 R6.2
NetD1_1: D1.1 L1.1 | length 375.7
  Bottom Layer w60: D1.1 -321.14,-691.14
  Bottom Layer w80: -321.14,-691.14 -321.14,-541.14 -235,-455
NetD1_2: D1.2 F2.2
NetD2_1: D2.1 L1.2 L4.1 | length 1157.9
  Bottom Layer w40: -71.93,-521.93 L1.2 L1.2@-71.93,-439
  Bottom Layer w60: -71.93,-521.93 -71.93,-588.07 -5,-655 260,-655 510,-905 D2.1 563.86,-668.74 L4.1
NetD3_1: D3.1 R1.2 | length 86.9
  Top Layer w20: R1.2 D3.1
NetF1_1: F1.1 H1.2
NetH2_2: H2.2 U2.34 | length 792.9
  Top Layer w0: v1@86.12,522.88 v1(86.12,527) 86.12,592.88
  Top Layer w10: v1@86.12,522.88 86.12,469.46 U2.34
  Bottom Layer w10: v1(86.12,527) 86.12,594.12 218,726 339.23,726 H2.2
NetH2_3: H2.3 U2.37 | length 605.8
  Top Layer w10: U2.37 186.1,528.51 249.51,528.51 v1(250,529)
  Bottom Layer w10: v1(250,529) 328,529 623.4,824.4 H2.3
NetH2_5: H2.5 U2.7 | length 1165.1
  Top Layer w10: v1(7,765) 7.38,765.38 7.38,802.54 U2.7
  Bottom Layer w10: v1(7,765) 219,765 379,925 379,999 442,1062 553,1062 776.6,838.4 H2.5
NetH4_1: PWM.1 U2.31 | length 1469.1
  Top Layer w8: U2.31 27.84,423 56.84,394 173.74,394 466.74,101 512,101 526,101 526,116 554,116 554,101 554,86 582,86 582,101 582,116 610,116 610,101 610,86 638,86 638,101 638,116 666,116 666,101 666,86 694,86 694,101 694,116 722,116 722,101 722,86 750,86 750,101 750,116 778,116 778,101 778,86 806,86 806,101 908,101 991,101 PWM.1
NetH4_2: PWM.2 U2.30 | length 1468.7
  Top Layer w8: U2.30 8.16,420.06 50.22,378 167.11,378 497.11,48 573,48 678,48 678,33.97 706,33.97 706,48 706,62.03 734,62.03 734,48 734,33.97 762,33.97 762,48 762,62.03 790,62.03 790,48 790,33.97 818,33.97 818,48 818,62.03 846,62.03 846,48 846,33.97 874,33.97 874,48 874,62.03 902,62.03 902,48 902,33.97 930,33.97 930,48 944,48 982,48 PWM.2
NetH4_3: PWM.3 U2.29 | length 1459
  Top Layer w8: U2.29 -11.53,417.12 43.59,362 160.48,362 528.48,-6 574,-6 588,-6 588,9 616,9 616,-6 616,-21 644,-21 644,-6 644,9 672,9 672,-6 672,-21 700,-21 700,-6 700,9 728,9 728,-6 728,-21 756,-21 756,-6 926,-6 936,-6 PWM.3
NetH4_4: PWM.4 U2.28 | length 1467.5
  Top Layer w8: U2.28 -31.21,414.17 36.96,346 153.86,346 549.91,-50.06 710,-50.06 724,-50.06 724,-37.24 752,-37.24 752,-50.06 780,-50.06 780,-35.3 808,-35.3 808,-50.06 808,-55.8 836,-55.8 836,-50.06 836,-35.3 864,-35.3 864,-50.06 880.06,-50.06 889.95,-59.95 909.75,-79.75 920.19,-69.32 939.99,-89.12 929.55,-99.55 960.5,-130.5 PWM.4
NetH4_5: PWM.5 U2.27 | length 1464.7
  Top Layer w8: U2.27 -50.9,411.23 30.33,330 147.23,330 546.97,-69.74 604,-69.74 618,-69.74 646,-69.74 674,-69.74 702,-69.74 730,-69.74 758,-69.74 786,-69.74 799.74,-69.74 809.64,-79.64 829.44,-99.44 818.83,-110.05 838.63,-129.84 849.24,-119.24 859.84,-108.63 879.64,-128.43 869.04,-139.04 936.5,-206.5 PWM.5
NetH4_6: PWM.6 U2.26 | length 1467.5
  Top Layer w8: U2.26 -70.58,408.29 24.13,313.57 140.43,313.57 543.43,-89.43 719.43,-89.43 PWM.6
NetL1_4: L1.4 L3.1 L4.2 pad.2@468,-238 pad.2@468,-278 pad.2@468,-313 pad.2@513,-238 pad.2@513,-278 pad.2@513,-313 pad.2@558,-238 pad.2@558,-278 pad.2@558,-313 pad.2@608,-238 pad.2@608,-278 pad.2@608,-313 pad.2@653,-238 pad.2@653,-278 pad.2@653,-313 | length 1617.5
  Top Layer w60: L3.1 126.62,-838.38 291,-674 414,-674 501,-587 501,-520 558,-463 558,-313 pad.2@558,-278
  Bottom Layer w40: 61.93,-523.07 L1.4
  Bottom Layer w60: 61.93,-523.07 98.86,-560 235,-560 320,-475 320,-355 399.88,-275.12 L4.2
NetM1_3: M1.3 R3.1 R5.2 | length 216.7
  Top Layer w10: R3.1 -431.47,268 R5.2 -458.37,221.53 M1.3
NetM1_4: M1.4 R3.2 R4.1 | length 140.7
  Top Layer w10: M1.4 -570.51,247.02 R3.2 -549.53,335.53 R4.1
NetU2_32: U2.32 U3.4 | length 644.6
  Top Layer w8: U2.32 47.53,435.28 72.81,410 180.37,410 228.45,361.92 ccw(c234.81,368.28) 241.17,361.92 252.49,373.23 272.29,353.43 260.97,342.12 ccw(c267.34,335.76) 260.97,329.39 356.37,234 430.71,234 471.52,193.19 479.14,193.19 U3.4
NetU2_33: U2.33 U3.1 | length 645
  Top Layer w8: U2.33 67.21,441.06 80.27,428 187.82,428 234.81,381.01 246.12,392.33 cw(c252.49,385.96) 258.85,392.33 291.38,359.8 cw(c285.01,353.43) 294.01,353.43 cw(c285.01,353.43) 291.38,347.07 280.07,335.76 289.96,325.86 309.76,306.06 329.56,286.26 340.77,297.47 360.57,277.67 349.36,266.46 363.82,252 432.71,252 471.52,290.81 479.14,290.81 U3.1
PGND: C4.2 D2.2 H1.1 L1.3 L1.5 L5.1 R7.1 | length 2809.4
  Top Layer w60: v2(-416,-362) -501,-362 -558,-419 -558,-754 v2(-493,-819) -389,-923 v2(-389,-970) ; v2(-215,-635) -214.62,-634.62 L5.1
  Bottom Layer w40: -10,-355 -5,-360 L1.3@-5,-454 ; 115,-355 128.86,-368.86 L1.5
  Bottom Layer w60: v2(-389,-970) -384,-975 L1.3@-6,-975 ; v2(-215,-635) -12,-838 -5,-838 62,-905 D2.2
  Bottom Layer w80: -558.15,-400 -465,-400 -420,-355 -10,-355 115,-355
pads on no net: U1.4 U2.1 U2.2 U2.3 U2.4 U2.10 U2.11 U2.12 U2.13 U2.16 U2.17 U2.21 U2.22 U2.25 U2.38 U2.39 U2.40 U2.41 U2.42 U2.43 U2.44 U2.45 U2.46 U3.5

## Polygon pours and split planes (outlines as drawn)
GND on Top Layer "Top Layer-GND 3" (solid, remove dead copper, pour order 8): -217.33,436.67 -217.33,823.33 -218,824 217,824 217,441 214,438
GND on Top Layer "Top Layer-GND" (solid, remove dead copper, pour order 14): -1228.82,362.83 ccw(c0,0) 525.36,1168.61 525.36,969.36 309,753 309,505 166.83,362.83
GND on Top Layer "Top Layer-GND 2" (solid, remove dead copper, pour order 0): -179,672 -180,671 -229,671 -328,770 -649,770 -701,822 -838,822 -1009,651 -1009,521 -869,381 -319,381 -144,556 -144,672
GND on Top Layer "Top Layer-GND 1" (solid, remove dead copper, pour order 6): 13.83,779.93 13.83,826.83 15,828 3,840 -114,840 -159,885 -259,885 -325,951 -325,1071 -260,1136 337,1136 390,1083 390,948 322,880 243,880 203,840 201,842 68.49,842 53.2,826.71 54,825.92 54,782
GND on Bottom Layer "Bottom Layer-GND" (solid, remove dead copper, pour order 2): -1279.53,0 ccw(c0,0) 0,-1279.53 ccw(c0,0) 1279.53,0 ccw(c0,0) 0,1279.53 ccw(c0,0)

## Keep-outs
Top Layer:
  circle w10: c0,0 r295.28
  circle w10: c0,0 r1279.53
Bottom Layer:
  circle w10: c0,0 r295.28
  circle w10: c0,0 r1279.53

## Other copper
Top Layer:
  region net +VPS: -876,-337 -840,-301 -749,-301 -705,-345 -705,-475 -726,-496 -788,-496 -876,-439
  region net -VPS: -423.75,-274 -445,-255.11 -445,-77.4 -424.5,-61 -318,-61 -300,-79 -300,-256 -318,-274
  region net NetL1_4: 454,-226 462,-217 659,-217 667,-227 667,-325 659,-333 462,-333 454,-325
  region: -1020,290
Bottom Layer:
  region net -VPS: -326,163 -327,164 -467,164 -467,39 -453,25 -453,-58 -438,-73 -438,-222 -362,-222 -353,-213 -302,-213 -302,-73 -325,-50 -325,44
  region net PGND: -932,156 -932,64 -931,63 -832,63 -775,6 -775,-109 -639,-109 -581,-51 -581,102 -636,157
  region net +VPS: -725,-475.87 -725,-639 -701,-663 -701,-799 -708,-806 -912,-806 -977,-741 -977,-644.87
  region net +VPS: -726,-528
  region net PGND: -932,64 -932,156 -929,159 -841,159
  region net PGND: -775,-233.66 -775,-73 -641,-73 -641,-250 -623,-268 -550,-268 -508,-310 -508,-435 -514,-441 -554.55,-441
  region net NetD1_1: -135,-495 -230,-495 -235,-490 -235,-415 -150,-415
  region net NetD1_2: -615,-500 -615,-850 -560,-850 -560,-735 -445,-620 -445,-535 -480,-500
  region net +VPS: -1005,-360 -899,-360 -840,-301 -749,-301 -705,-345 -705,-475 -725,-495 -725,-620 -780,-620 -780,-500
  region net NetF1_1: -1005,-235 -1005,-30 -970,5 -835,5 -815,-15 -815,-95 -885,-165 -885,-235
  region: -1005,-235

## Silkscreen, mask and mechanical layers (free items; w line width, h text height)
Top Overlay:
  lines w20: -994,-189 -921,-188 ; -960,-151.52 -959,-224.52
  text "3V3" at 487,1089 h30 r320
  text "DIO" at 566,1018 h30 r320
  text "CLK" at 641,957 h30 r320
  text "GND" at 717,891 h30 r320
  text "NRST" at 800,822 h30 r320
  text "CANH" at 978,700 h30 r295
  text "A" at -681,601 h30 r60
  text "CANL" at 1038,571 h30 r295
  text "B" at -729,521 h30 r60
  text "C" at -777,438 h30 r60
  text "GND" at 1098,438 h30 r295
  text "GND" at -843,321 h30 r60
  text "5V" at -891,240 h30 r60
  text "VIAM LAB" at 664,-628 h30
  text "PCB: MCU" at 663,-700 h30